# EAGLE board Spring_Rev2_expander_panel (EAGLE 7.7.0)
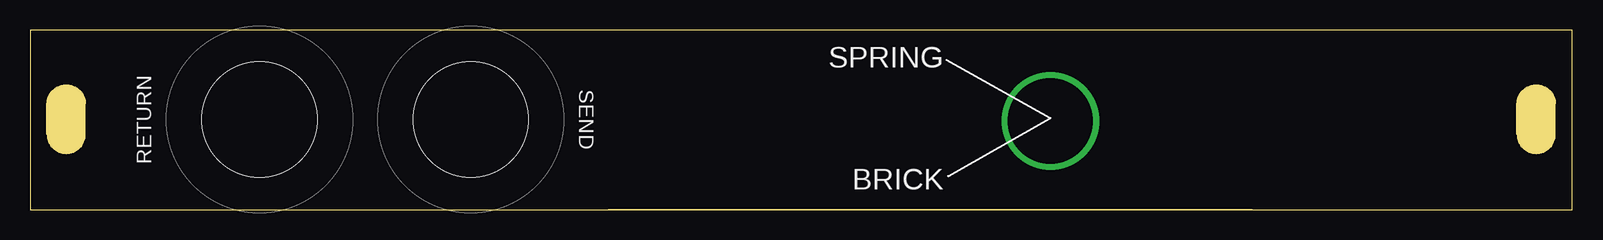
[diagram p0: board, top side]
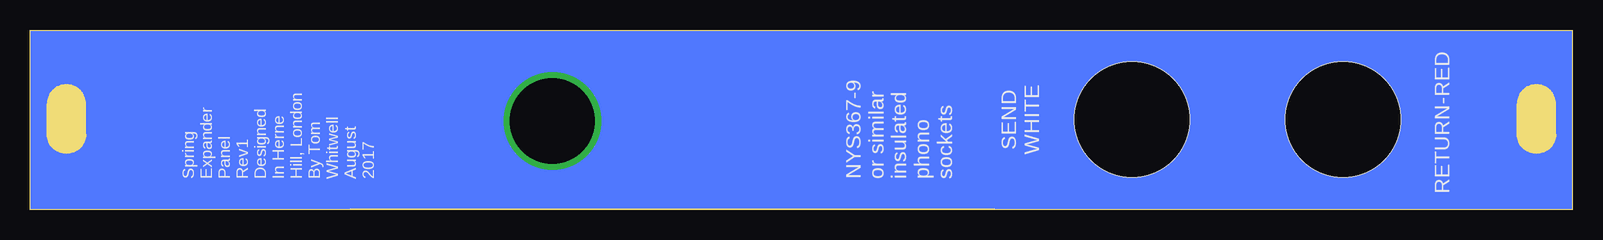
[diagram p1: board, bottom side, seen from below]

Size 128.5 x 14.94 mm. Coordinates in mm from the lower left corner, seen from the top.
Outline: 48.17,0.02 101.82,0.02
Copper layers (1*16): Top 0.035mm / dielectric 1.5mm / Bottom 0.035mm
Design rules "default": minimum track width 10mil, minimum drill 24mil, track to track 8mil, track to pad 8mil, pad to pad 8mil, via to via 8mil, smd to smd 8mil, copper to edge 40mil, drill to drill 8mil, minimum pad ring 10mil, minimum via ring 8mil, stop-mask expansion 4mil, vias tented up to drill 0mil, thermal gap 10mil
Holes 9.6 mm at 19.1,7.5 36.7,7.5

## Placement (x,y rotation side)
U$2  [PANEL_3HP]  0,0 0 top

## Library data of the parts
U$2 = MusicThingModular

## Tracks (layer width: path | path; a pad name or v marks a point on that pad's centre or on a via)
GNDA  (via drill 7.1)
  other vias: 85,7.38

## Text on the board
tPlace: SPRING | RETURN | SEND | BRICK
bPlace: SEND / WHITE | RETURN-RED | NYS367-9 / or similar / insulated / phono / sockets | Spring / Expander / Panel / Rev1 / Designed / In Herne / Hill, London / By Tom / Whitwell / August / 2017